# Altium PCB ACS_PCB.PcbDoc
Units mm, origin at the board's own origin, x right, y up, seen from the top; angles counter-clockwise.
Board outline 75 x 46 mm, 2 copper layers (Top Layer, Bottom Layer); 36 components, 26 nets, 126 pads, 19 vias.
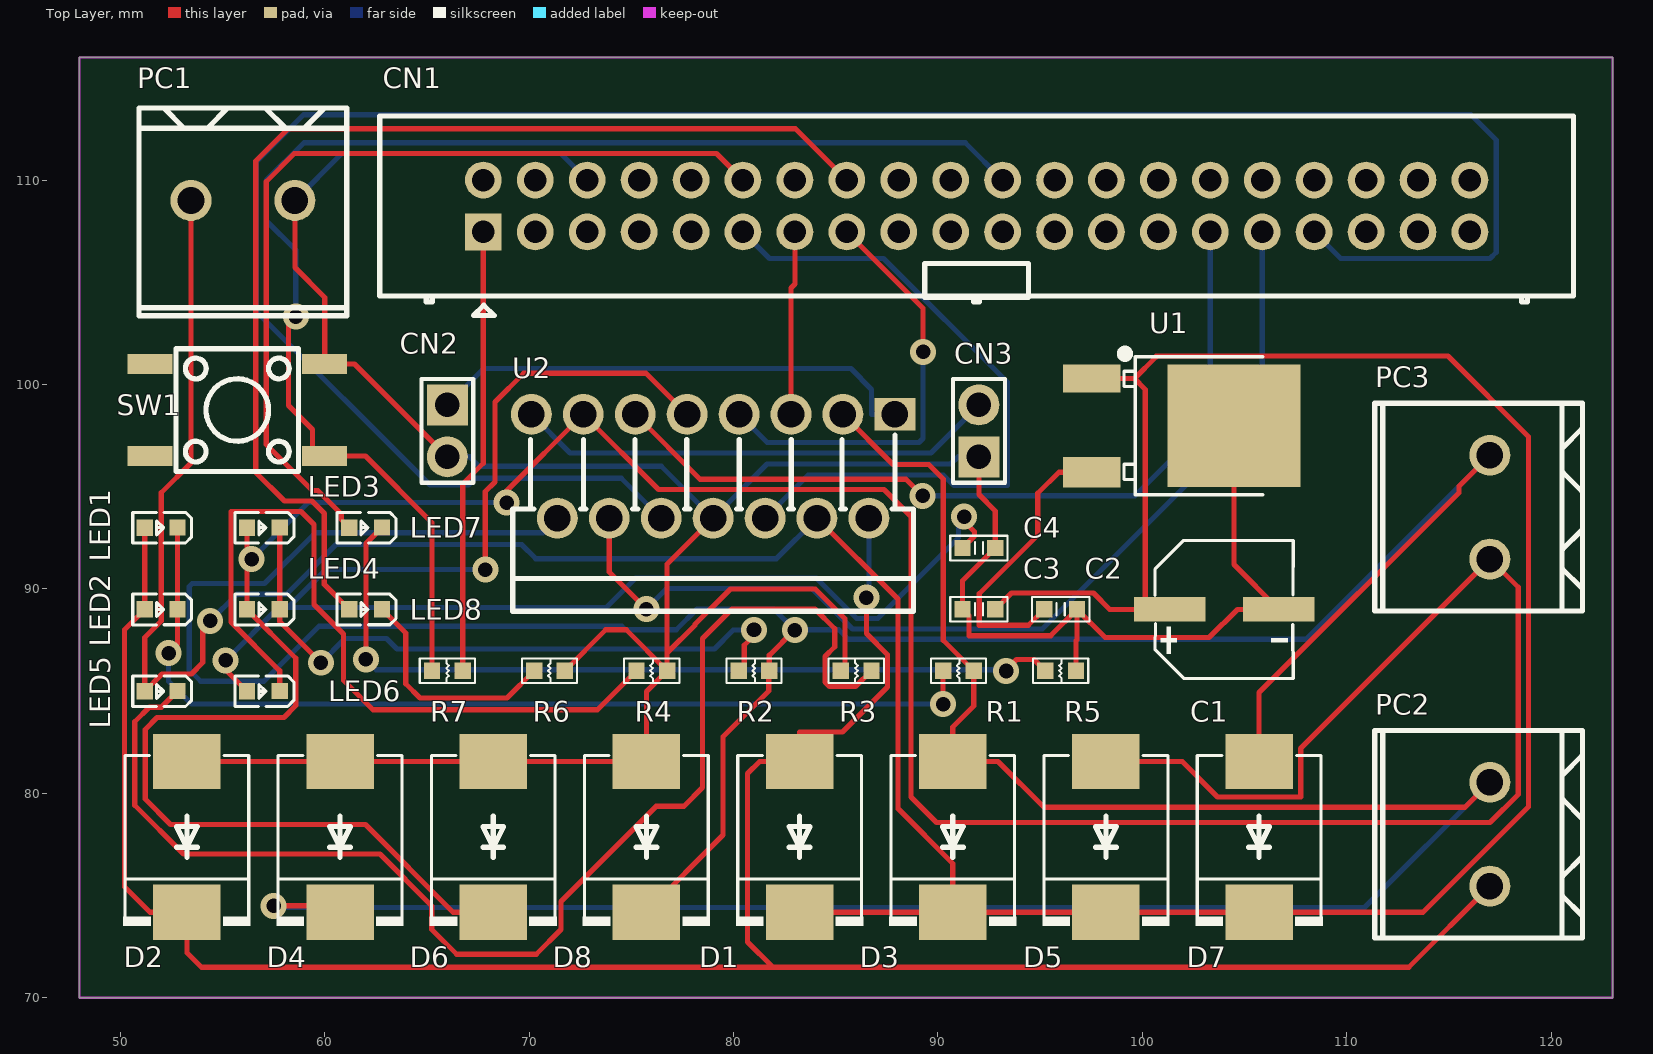
[diagram p0: Top Layer view]
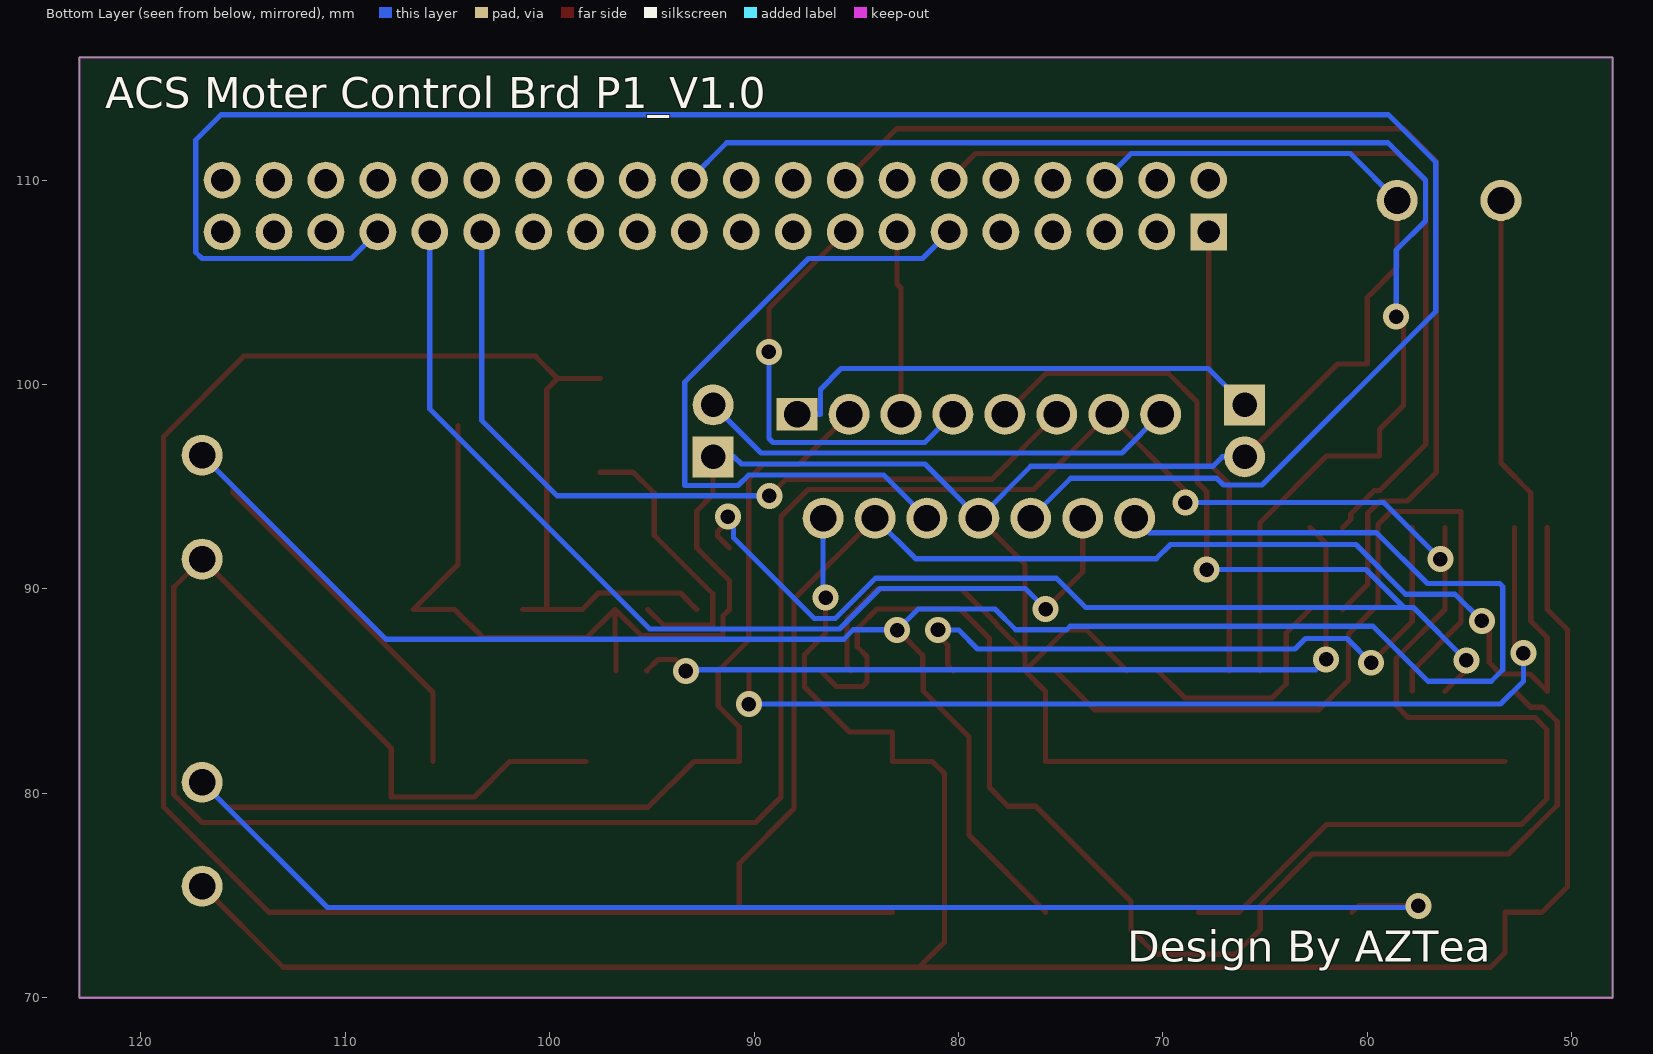
[diagram p1: Bottom Layer view, seen from below]

## Layer stack, top to bottom
Top Solder: solder mask 0.0102, Solder Resist, Dk 3.5
Top Layer: signal copper 0.0356
Dielectric 1: dielectric 0.32, FR-4, Dk 4.8
Bottom Layer: signal copper 0.0356
Bottom Solder: solder mask 0.0102, Solder Resist, Dk 3.5

## Board outline
48,70 48,116 123,116 123,70

## Design rules (kind name [scope] priority, off if disabled: settings)
Clearance [All] p1: gap=0.254 ignorepadtopadclearanceinfootprint=FALSE except(0: Arc-Hole Track-Hole SMDPad-Hole THPad-Hole Via-Hole Fill-Hole Poly-Hole Region-Hole Text-Hole)
MinimumSolderMaskSliver [All] p1: minsoldermaskwidth=0.1
PolygonConnect [All] p1: connectstyle=Relief reliefconductorwidth=0.254 reliefentries=4 polygonreliefangle="90 Angle" airgapwidth=0.254
RoutingVias [All] p1: holewidth=0.711 width=1.27 viastyle="Through Hole" minholewidth=0.711 minwidth=1.27 maxholewidth=0.711 maxwidth=1.27
SilkToSilkClearance [All] p1: silktosilkclearance=0.1
SilkToSolderMaskClearance [IsPad] p1: minsilkscreentomaskgap=0 clearancetoexposedcopper=TRUE
SolderMaskExpansion [All] p1: expansion=0.102 istentingtop=FALSE
Width [All] p1: maxlimit=0.254 minlimit=0.254 preferedwidth=0.254
27 further rules are at their usual default settings.

## Components (designator, comment, footprint, x,y, rotation, side; value= is the part's Value field where it differs from the comment)
C1 "220u" C0605 104,89 r0 top
C2 "0.1u" C0603 96,89 r0 top
C3 "0.1u" C0603 92,89 r0 top
C4 "0.1u" C0603 92,92 r180 top
CN1 "GPIO_40Pin_M" GPIO_40Pin_M 91.89,108.73 r0 top
CN2 "Connector" 2PIN 66,97.73 r270 top
CN3 "Connector" 2PIN 92,97.73 r90 top
D1 "SS52" SMC(DO-214AB) 83.23,77.995 r90 top
D2 "SS52" SMC(DO-214AB) 53.258,77.995 r90 top
D3 "SS52" SMC(DO-214AB) 90.723,77.995 r90 top
D4 "SS52" SMC(DO-214AB) 60.751,77.995 r90 top
D5 "SS52" SMC(DO-214AB) 98.216,77.995 r90 top
D6 "SS52" SMC(DO-214AB) 68.244,77.995 r90 top
D7 "SS52" SMC(DO-214AB) 105.709,77.995 r90 top
D8 "SS52" SMC(DO-214AB) 75.737,77.995 r90 top
LED1 "Green" LED0603 52,93 r180 top
LED2 "Blue" LED0603 52,89 r180 top
LED3 "Green" LED0603 57,93 r180 top
LED4 "Blue" LED0603 57,89 r180 top
LED5 "Green" LED0603 52,85 r180 top
LED6 "Green" LED0603 57,85 r180 top
LED7 "Green" LED0603 62,93 r180 top
LED8 "Green" LED0603 62,89 r180 top
PC1 "PConnector" PC_2Pin 56,109 r180 top
PC2 "PConnector" PC_2Pin 117,78 r90 top
PC3 "PConnector" PC_2Pin 117,94 r90 top
R1 "20k" R0603 91,86 r180 top
R2 "20k" R0603 81,86 r180 top
R3 "20k" R0603 86,86 r0 top
R4 "4.7k" R0603 76,86 r180 top
R5 "220" R0603 96,86 r180 top
R6 "220" R0603 71,86 r180 top
R7 "10k" R0603 66,86 r0 top
SW1 "Switch" Switch 55.725,98.75 r90 top
U1 "78M05" 78M05 101,98 r0 top
U2 "L298N" L298N 79,96 r180 top

## Footprints (in the part's own frame and the unit in brackets; to place one, negate y for a bottom-side part, rotate by r counter-clockwise, add the part's x,y. Pads: shape width x height; smd on the part's side, far side on the other; paste and mask are expansions set on the pad)
2PIN [mm]
  rect 2x2 hole 1.2: 1(-1.27,0)
  round 2 hole 1.2: 2(1.27,0)
  silkscreen extent -2.54,-1.27 2.54,1.27
78M05 [mm] "TO-252-2"
  rect 2.8x1.35 smd: 1(-3.475,2.29)
  rect 2.8x1.5 smd: 3(-3.475,-2.29)
  rect 6.5x6 smd: 4(3.475,-0.017)
  silkscreen extent -2.06,-3.39 4.9,3.7
C0603 [mm]
  rect 0.8x0.8 smd: 1(-0.8,0) 2(0.8,0)
  silkscreen extent -1.4,-0.6 1.4,0.6, body extent -0.8,-0.41 0.8,0.41, height 0.9
C0605 [mm] "RVT220UF35V67RV0024"
  rect 3.5x1.2 smd: 1(-2.67,0) 2(2.67,0)
  silkscreen extent -3.38,-3.38 3.38,3.38
GPIO_40Pin_M [mm]
  rect 1.8x1.8 hole 1.1: 1(-24.13,-1.27)
  round 1.8 hole 1.1: 2(-24.13,1.27) 3(-21.59,-1.27) 4(-21.59,1.27) 5(-19.05,-1.27) 6(-19.05,1.27) 7(-16.51,-1.27) 8(-16.51,1.27) 9(-13.97,-1.27) 10(-13.97,1.27) 11(-11.43,-1.27) 12(-11.43,1.27) 13(-8.89,-1.27) 14(-8.89,1.27) 15(-6.35,-1.27) 16(-6.35,1.27) 17(-3.81,-1.27) 18(-3.81,1.27) 19(-1.27,-1.27) 20(-1.27,1.27) 21(1.27,-1.27) 22(1.27,1.27) 23(3.81,-1.27) 24(3.81,1.27) 25(6.35,-1.27) 26(6.35,1.27) 27(8.89,-1.27) 28(8.89,1.27) 29(11.43,-1.27) 30(11.43,1.27) 31(13.97,-1.27) 32(13.97,1.27) 33(16.51,-1.27) 34(16.51,1.27) 35(19.05,-1.27) 36(19.05,1.27) 37(21.59,-1.27) 38(21.59,1.27) 39(24.13,-1.27) 40(24.13,1.27)
  silkscreen extent -29.2,-5.36 29.2,4.4
L298N [mm] "Multiwatt 15"
  rect 2x1.6 hole 1.3: 1(-8.89,-2.54)
  round 2 hole 1.3: 2(-7.62,2.54) 3(-6.35,-2.54) 4(-5.08,2.54) 5(-3.81,-2.54) 6(-2.54,2.54) 7(-1.27,-2.54) 8(0,2.54) 9(1.27,-2.54) 10(2.54,2.54) 11(3.81,-2.54) 12(5.08,2.54) 13(6.35,-2.54) 14(7.62,2.54) 15(8.89,-2.54)
  silkscreen extent -9.8,-1.52 9.8,7.09
LED0603 [mm]
  rect 0.8x0.8 smd: 1(-0.799,-0.003) 2(0.799,0.004)
  silkscreen extent -1.49,-0.75 1.39,0.76
PC_2Pin [mm]
  round 2 hole 1.3: 1(-2.54,0) 2(2.54,0)
  silkscreen extent -5.08,-4.52 5.08,5.64
R0603 [mm]
  rect 0.8x0.8 smd: 1(-0.75,0) 2(0.75,0)
  silkscreen extent -1.35,-0.6 1.35,0.6, body extent -0.8,-0.4 0.8,0.41, height 0.9
SMC(DO-214AB) [mm]
  rect 2.7x3.3 smd: 1(-3.81,0) 2(3.563,0)
  silkscreen extent -4.48,-3.1 3.85,3.1
Switch [mm]
  rect 0.98x2.2 smd: 1(-2.25,-4.275) 2(-2.25,4.275) 3(2.25,-4.275) 4(2.25,4.275)
  silkscreen extent -3,-3 3,3

## Part data
C1: library part "cap 0605", "C0605 Electrolytic Capacitor"
C2 C3 C4: library part "cap 0603 NonE", "C0603 non Electrolytic Capacitor"
CN1: "GPIO 40pin Male Connector"
CN2 CN3: "2pin connector"
D1 D2 D3 D4 D5 D6 D7 D8: "SS52 Diode"
LED1 LED2 LED3 LED4 LED5 LED6 LED7 LED8: library part "led 0603", "LED0603"
PC1 PC2 PC3: "2Pin"
R1 R2 R3 R4 R5 R6 R7: library part "Res 0603", "Resistor", Rang=1%, Revision="July-2002: Re-released for DXP Platform."
U1: "Linear Voltage Regulators (LDO)"
U2: "HGSEMI L298N"

## Via types
v1: diameter 1.27, hole 0.711, Top Layer to Bottom Layer, 19 vias

## Nets (pads, with @x,y where several pads share a name; then routed paths per layer and width w, separated by ;. In a path a pad name is that pad's centre, name@x,y a point inside that pad or via, vN(x,y) a via of type N, cw(c..) or ccw(c..) an arc to the next point about the centre after c; other vN are vias at no path point)
3d3V_DC: CN1.1 R7.2 | length 21.9
  Top Layer w0.254: R7.2 66.75,95.134 67.76,96.144 CN1.1
GND: C1.2 C2.2 C3.1 C4.1 CN1.6 CN2.2 CN3.1 D2.2 D4.2 D6.2 D8.2 PC1.1 R3.1 R4.1 R5.1 R6.1 SW1.3 U1.4 U2.8 | length 156
  Top Layer w0.254: D2.2 D4.2 D6.2 D8.2 75.737,84.987 R4.1 ; PC1.1 58.54,105.716 60,104.256 SW1.3 61.46,101 CN2.2 ; R6.1 73.75,88 74.75,88 R4.1 ; U2.8 76.75,91.21 76.75,86.86 ; R3.1 85.457,86.207 85.457,88.543 84,90 79.845,90 78.113,88.268 78.113,88.223 76.75,86.86 ; CN3.1 92,94.616 92.8,93.816 C4.1 91.2,90.4 C3.1 91.511,88.689 91.511,87.711 95.511,87.711 C2.2 ; R5.1 96.75,87.466 96.8,87.516 C2.2 ; U1.4 104.475,91.195 C1.2 104.645,89 103.264,87.619 98.181,87.619 C2.2 ; R4.1 76.75,86.86
  Bottom Layer w0.254: PC1.1 60.832,111.292 71.548,111.292 CN1.6 ; CN2.2 67.092,96.46 67.552,96.001 76.459,96.001 U2.8 81.642,96.102 90.615,96.102 90.972,96.46 CN3.1
GPIO5: CN1.29 U2.11 | length 40.5
  Top Layer w0.254: U2.11 78.364,95.366 88.43,95.366 v1(89.243,94.553)
  Bottom Layer w0.254: v1(89.243,94.553) 99.632,94.553 103.32,98.241 CN1.29
GPIO6: CN1.31 U2.12 | length 49.7
  Top Layer w0.254: U2.12 73.92,90.826 v1(75.73,89.016)
  Bottom Layer w0.254: v1(75.73,89.016) 76.731,90.016 83.844,90.016 85.818,88.042 95.102,88.042 105.86,98.8 CN1.31
GPIO13: CN1.33 U2.10 | length 108.8
  Bottom Layer w0.254: U2.10 74.503,95.417 67.374,95.417 67.036,95.079 65.146,95.079 56.651,103.574 56.651,110.889 58.959,113.197 116.066,113.197 117.31,111.952 117.31,106.466 117.005,106.161 109.699,106.161 CN1.33
GPIO14: CN1.12 LED7.2 | length 43.2
  Top Layer w0.254: LED7.2 60.807,93.39 60.807,93.664 59.664,94.807 59.39,94.807 57.138,97.059 57.138,109.92 58.509,111.292 79.168,111.292 CN1.12
GPIO17: CN1.11 U2.6 | length 34
  Bottom Layer w0.254: CN1.11 81.759,106.161 87.338,106.161 93.383,100.116 93.383,95.061 90.776,95.061 90.259,95.577 83.657,95.577 U2.6
GPIO18: CN1.16 LED8.2 | length 55.2
  Top Layer w0.254: LED8.2 59.982,90.215 59.982,93.689 59.373,94.299 58.027,94.299 56.63,95.696 56.63,110.936 58.204,112.511 83.029,112.511 CN1.16
GPIO22: CN1.15 U2.7 | length 21.3
  Top Layer w0.254: CN1.15 89.271,103.729 v1(89.271,101.59)
  Bottom Layer w0.254: U2.7 81.651,97.159 89.071,97.159 89.271,97.359 v1(89.271,101.59)
GPIO25: CN1.22 R7.1 SW1.1 | length 66.7
  Top Layer w0.254: v1(58.585,103.316) 58.23,102.96 58.23,98.973 59.398,97.804 59.398,96.5 SW1.1 61.989,96.5 65.25,93.239 R7.1
  Bottom Layer w0.254: v1(58.585,103.316) 58.585,106.578 57.159,108.004 57.159,109.996 58.988,111.825 91.335,111.825 CN1.22
GPIO27: CN1.13 U2.5 | length 9
  Top Layer w0.254: U2.5 82.81,104.726 83,104.916 CN1.13
NetC2_1: C2.1 U1.3 | length 14.2
  Top Layer w0.254: C2.1 94.419,88.219 92.019,88.219 92.019,89.76 94.882,92.623 94.882,94.68 95.912,95.71 U1.3
NetCN2_1: CN2.1 U2.1 | length 24.3
  Bottom Layer w0.254: CN2.1 67.776,100.776 85.738,100.776 86.754,99.76 86.754,98.54 U2.1
NetCN3_2: CN3.2 U2.15 | length 23.6
  Bottom Layer w0.254: U2.15 71.999,96.651 89.651,96.651 CN3.2
NetLED1_1: LED1.1 LED2.1 R1.2 | length 47.7
  Top Layer w0.254: v1(52.362,86.857) 52.799,87.294 LED2.1 52.799,90.997 LED1.1 ; v1(90.25,84.368) R1.2
  Bottom Layer w0.254: v1(52.362,86.857) 52.362,85.485 53.48,84.368 v1(90.25,84.368)
NetLED3_1: LED3.1 LED4.1 R2.2 | length 32
  Top Layer w0.254: LED3.1 LED4.1 57.799,88.405 v1(59.817,86.387) ; R2.2 80.523,86.273 80.523,87.248 81,87.725 v1(81,88)
  Bottom Layer w0.254: v1(59.817,86.387) 60.998,87.568 63.03,87.568 63.538,87.06 79.06,87.06 79.984,87.984 80.984,87.984 v1(81,88)
NetLED5_1: LED5.1 R3.2 | length 62.7
  Top Layer w0.254: LED5.1 52.011,84.216 51.423,84.216 50.711,83.504 50.711,79.415 53.099,77.027 62.7,77.027 65.24,74.487 65.24,73.344 66.459,72.125 70.346,72.125 71.565,73.344 71.565,74.716 76.213,79.364 77.559,79.364 78.474,80.278 78.474,87.568 79.922,89.016 83.984,89.016 84.949,88.051 84.949,87.172 84.469,86.691 84.469,85.442 84.692,85.219 85.969,85.219 R3.2
NetLED6_1: LED6.1 R4.2 | length 38
  Top Layer w0.254: LED6.1 57.799,85.992 55.41,88.381 55.41,93.791 58.839,93.791 59.474,93.156 59.474,89.244 60.922,87.797 60.922,85.536 62.37,84.088 73.338,84.088 R4.2
NetLED7_1: LED7.1 R5.2 | length 40.7
  Top Layer w0.254: v1(62.014,86.552) 62.014,92.218 LED7.1 ; v1(93.333,85.984) 93.333,86.044 93.841,86.552 94.698,86.552 R5.2
  Bottom Layer w0.254: v1(62.014,86.552) 62.522,86.044 93.273,86.044 v1(93.333,85.984)
NetLED8_1: LED8.1 R6.2 | length 11.3
  Top Layer w0.254: LED8.1 63.961,87.842 63.961,85.359 64.656,84.664 68.914,84.664 R6.2
Output1: D1.2 D2.1 LED1.2 LED2.2 PC2.1 U2.2 | length 117.4
  Top Layer w0.254: LED1.2 LED2.2 50.203,87.999 50.203,75.43 51.448,74.185 D2.1 53.258,72.2 53.968,71.49 81.928,71.49 ; v1(86.5,89.575) 86.5,87.812 87.531,86.781 87.531,85.206 85.321,82.996 83.23,82.996 D1.2 81.277,81.558 80.683,80.964 80.683,72.734 81.928,71.49 ; PC2.1 113.03,71.49 81.928,71.49
  Bottom Layer w0.254: v1(86.5,89.575) 86.62,89.695 U2.2
Output2: D3.2 D4.1 PC2.2 R1.1 U2.3 | length 114.2
  Top Layer w0.254: v1(57.5,74.5) 60.436,74.5 D4.1 ; U2.3 87.804,96.085 89.548,96.085 90.259,95.374 90.259,87.491 R1.1 91.75,84.277 90.723,83.25 D3.2 92.942,81.558 95.181,79.319 115.779,79.319 PC2.2
  Bottom Layer w0.254: v1(57.5,74.5) 57.589,74.411 110.871,74.411 PC2.2
Output3: D5.2 D6.1 LED3.2 LED4.2 PC3.1 U2.13 | length 160.5
  Top Layer w0.254: LED3.2 v1@56.201,91.228 ; v1(56.426,91.454) v1@56.201,91.228 ; D6.1 66.282,74.185 61.992,78.475 52.464,78.475 51.219,79.719 51.219,83.123 51.804,83.708 58.002,83.708 58.585,84.291 58.585,86.612 LED4.2 v1@56.201,91.228 ; v1(68.898,94.223) 68.898,94.788 U2.13 76.332,94.858 87.364,94.858 88.684,93.537 88.684,79.821 89.929,78.576 117.009,78.576 118.381,79.948 118.381,90.079 PC3.1 107.74,82.2 107.74,79.827 103.678,79.827 101.947,81.558 D5.2
  Bottom Layer w0.254: v1(56.426,91.454) 59.195,94.223 v1(68.898,94.223)
Output4: D7.2 D8.1 PC3.2 R2.1 U2.14 | length 129.7
  Top Layer w0.254: D8.1 75.737,74.208 79.49,77.96 79.49,82.767 81.737,85.015 ; 81.725,85.028 R2.1@81.725,86 ; R2.1 81.75,86.75 82.984,87.984 v1(83,87.984) ; D7.2 105.709,84.926 115.483,94.701 115.483,95.023 PC3.2
  Bottom Layer w0.254: U2.14 70.67,92.75 59.551,92.75 57.061,90.26 53.524,90.26 53.378,90.115 53.378,86.044 53.937,85.485 57.036,85.485 59.728,88.178 74.529,88.178 74.707,88 77.2,88 78.216,89.016 81.968,89.016 v1(83,87.984) ; v1@83,88 85.141,88 85.608,87.534 107.994,87.534 PC3.2
VCC_12V: C1.1 C3.2 D1.1 D3.1 D5.1 D7.1 LED5.2 PC1.2 U1.1 U2.4 | length 185
  Top Layer w0.254: PC1.2 53.46,96.159 52.007,94.705 52.007,88.425 51.201,87.619 LED5.2 52.038,85.834 53.48,85.834 54.039,86.393 54.039,88.076 v1(54.394,88.432) ; D1.1 D3.1 ; U2.4 88.039,89.501 88.039,79.251 90.723,76.567 D3.1 ; C3.2 93.603,89.803 97.6,89.803 98.403,89 C1.1@100.14,89 ; U1.1 99.61,100.29 ; C1.1 C1.1@100.14,89 ; D3.1 D5.1 D7.1 113.727,74.185 118.889,79.347 118.889,97.445 114.948,101.386 100.673,101.386 100.673,101.353 99.61,100.29 ; 99.61,100.29 100.14,99.76 C1.1@100.14,89
  Bottom Layer w0.254: v1(54.394,88.432) 55.703,89.741 58.128,89.741 60.553,92.165 69.634,92.165 70.32,91.48 82.1,91.48 U2.4
VSS_5V: C4.2 LED6.2 U2.9 | length 74.7
  Top Layer w0.254: v1(55.156,86.501) 55.156,86.041 LED6.2 ; v1(67.856,90.946) 67.856,94.762 68.326,95.232 68.326,99.138 69.736,100.547 75.723,100.547 U2.9 ; C4.2 91.783,92.583 91.783,92.794 91.275,93.302 v1(91.275,93.537)
  Bottom Layer w0.254: v1(55.156,86.501) 57.747,89.092 58.208,89.092 ; v1(67.856,90.946) 60.062,90.946 58.208,89.092 ; v1(91.275,93.537) 91.275,93.262 91,92.987 91,92.5 87.05,88.55 86.028,88.55 84.054,90.524 75.207,90.524 73.775,89.092 58.208,89.092
pads on no net: CN1.2 CN1.3 CN1.4 CN1.5 CN1.7 CN1.8 CN1.9 CN1.10 CN1.14 CN1.17 CN1.18 CN1.19 CN1.20 CN1.21 CN1.23 CN1.24 CN1.25 CN1.26 CN1.27 CN1.28 CN1.30 CN1.32 CN1.34 CN1.35 CN1.36 CN1.37 CN1.38 CN1.39 CN1.40 SW1.2 SW1.4

## Keep-outs
Keep-Out Layer:
  the board outline again, w0.1

## Silkscreen, mask and mechanical layers (free items; w line width, h text height)
Bottom Overlay:
  text "ACS Moter Control Brd P1_V1.0" at 121.746,113.508 h1.52
  text "Design By AZTea" at 71.746,71.762 h1.52